# Altium PCB LPC55S69_MINI [B].PCBdoc (part 2 of 2)
Units mil, origin at the board's own origin, x right, y up, seen from the top; angles counter-clockwise.
Board outline 1610.03 x 1685.03 mil, 2 copper layers (Top Layer, Bottom Layer), stack 31.2 mil thick; 68 components, 56 nets, 271 pads, 122 vias.
Unrouted connection lines stored in the file: 1.
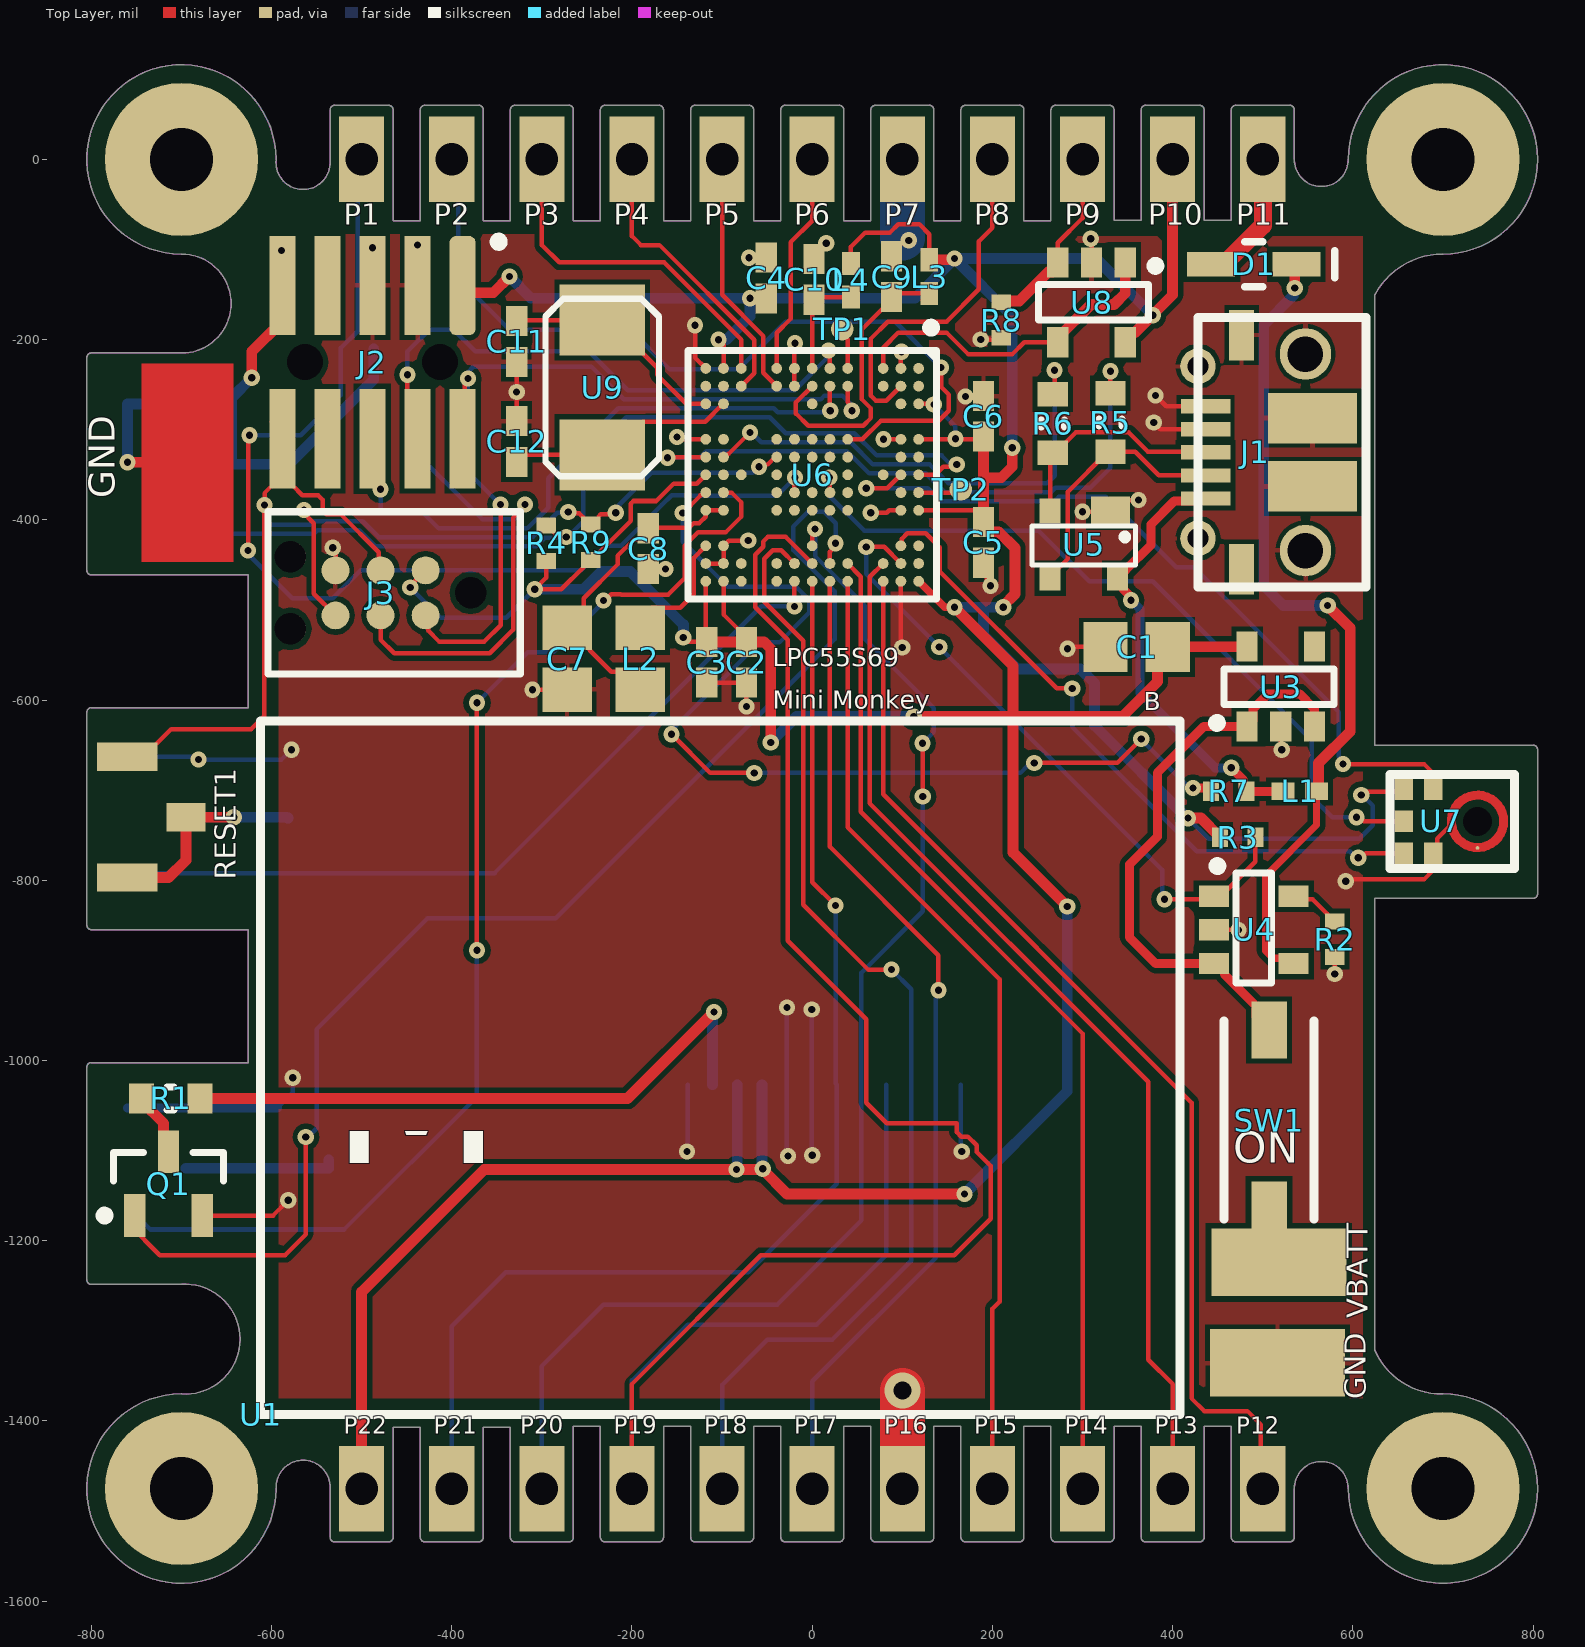
[diagram p0: Top Layer view]

## Via types
v1: diameter 18, hole 8, Top Layer to Bottom Layer, tented both sides, 121 vias
v2: diameter 40, hole 20, Top Layer to Bottom Layer, tented both sides, 1 vias

## Nets (pads, with @x,y where several pads share a name; then routed paths per layer and width w, separated by ;. In a path a pad name is that pad's centre, name@x,y a point inside that pad or via, vN(x,y) a via of type N, cw(c..) or ccw(c..) an arc to the next point about the centre after c; other vN are vias at no path point) (continued)
MIC_DATA: (continued)
  Bottom Layer w5: v1(19,-353) 19,-373.06 57.94,-412 251.06,-412 307.32,-468.26 377.74,-468.26 554.17,-644.69 554.17,-707.17 577,-730 v1(604,-730)
MIC_WS: U6.B11 U7.1 | length 761.3
  Top Layer w5: U6.B11 99.62,-427.54 99.62,-420.85 105.47,-415 126.08,-415 141.69,-430.6 141.69,-457.35 271.33,-587 v1(288.67,-587) ; v1(606,-775) 609.52,-775 614.52,-770 U7.1
  Bottom Layer w5: v1(288.67,-587) 288.67,-629.83 426.75,-767.92 596.57,-767.92 v1@606.38,-777.72
NetC7_2: C7.2 C8.2 L2.1 U6.M9 U6.N9 | length 370.8
  Top Layer w5: C7.2 -270.52,-518.07 -253.59,-501.14 -253.59,-487.06 -216,-449.47 -216,-439.99 -198.26,-422.25 -191.31,-422.25 -182,-412.94 -182,-405.49 -176.51,-400 -176.51,-409 -136.8,-409 -131.3,-403.5 -125.17,-403.5 -118.11,-396.44 U6.N9 U6.M9 ; C7.2@-269.05,-519.55 -246.94,-541.66 -246.94,-544.61 -223.13,-568.42 -211.03,-568.42 L2.1
NetC9_1: C9.1 L3.2 U6.G2 | length 337.8
  Top Layer w5: U6.G2 -18,-269.57 -18,-282 -4.5,-295.5 56.65,-295.5 65.24,-286.91 65.24,-276.38 55.24,-266.38 55.24,-188.32 88,-155.56 88,-150.64 89.94,-148.7 L3.2 130,-149.07 L3.2@122.66,-156.41
NetC10_2: C10.2 L4.2 U6.G1 | length 119.3
  Top Layer w5: U6.G1 0,-157.64 C10.2 4.94,-152.7 L4.2
NetC11_2: C11.2 U6.N3 U9.2 | length 253.7
  Top Layer w5: C11.2 -326.83,-178.2 U9.2 -224.8,-178.2 -172,-231 -172,-239.2 -139.94,-271.26 U6.N3
NetC12_2: C12.2 U6.M3 U9.1 | length 256.2
  Top Layer w5: C12.2 -320.17,-327.8 -225.13,-327.8 -188.26,-290.93 -185.33,-290.93 -118.69,-290.93 -99.02,-271.26 U6.M3
NetD1_2: D1.2 L1.2 U4.4 | length 909.6
  Top Layer w8: U4.4 528.48,-886.59 511.59,-886.59 503.19,-878.19 503.19,-795.23 559.7,-738.72 L1.2
  Top Layer w12: v1(535.58,-142.58) 535.58,-118.02 D1.2 ; 561.86,-690.47 561.86,-669.86 597,-634.72 597,-520 v1(572,-495)
  Bottom Layer w12: v1(535.58,-142.58) 534.43,-143.73 534.43,-150.57 501,-184 501,-473.17 522.83,-495 v1(572,-495)
NetL2_2: L2.2 U6.N11 | length 130.4
  Top Layer w5: L2.2@-191,-510.55 -177.89,-497.44 -146.44,-497.44 -131.63,-482.63 -131.63,-442.26 U6.N11
NetP9_1: P9.1 R8.2 U8.3 | length 209.4
  Top Layer w5: U8.3 272.6,-92.4 300,-65 P9.1
  Top Layer w12: R8.2 211.42,-157.09 229.72,-157.09 261.87,-124.95 266.79,-124.95 272.6,-119.14 U8.3
NetQ1_3: Q1.3 R1.1 | length 79.2
  Top Layer w12: R1.1@-744.48,-1044.95 -719.73,-1069.7 -719.73,-1095.81 Q1.3 Q1.3@-714.4,-1090.57
NetR1_2: R1.2 U2.2 | length 691.9
  Top Layer w12: R1.2 -205,-1042 v1(-109,-946)
  Bottom Layer w12: U2.2 -110.71,-947.71 v1(-109,-946)
NetR2_2: R2.2 U4.5 | length 58.5
  Top Layer w5: U4.5 537.92,-821.22 555.59,-821.22 571.67,-837.3 571.67,-839.27 578.03,-845.63 R2.2
NetR5_2: R5.2 U6.N6 | length 711.5
  Top Layer w5: v1(-160.57,-331.15) -159.74,-330.32 U6.N6 ; R5.2@322.31,-250.83 R5.2 v1(331,-235)
  Bottom Layer w5: v1(-160.57,-331.15) -125.09,-331.15 -117.75,-323.82 38.53,-323.82 63.22,-348.5 126.02,-348.5 147.02,-369.5 264.64,-369.5 269.64,-364.5 308.5,-364.5 331,-342 v1(331,-235)
NetR6_2: R6.2 U6.M6 | length 550
  Top Layer w5: U6.M6 -96.53,-330.32 -93.04,-326.82 -92.82,-326.82 v1(-69,-303) ; R6.2 269,-258.52 v1(269,-234)
  Bottom Layer w5: v1(-69,-303) -67.3,-303 -56.48,-313.82 42.67,-313.82 67.36,-338.5 130.17,-338.5 151.17,-359.5 260.5,-359.5 269,-351 v1(269,-234)
NetR7_1: R7.1 U6.N8 | length 1106.5
  Top Layer w5: v1(-156,-638) -113.13,-680.87 v1(-64.36,-680.87) ; v1(-143.63,-392.5) -124.01,-372.88 -123.2,-372.88 -120,-369.69 U6.N8 ; v1(246.33,-669.67) 338.7,-669.67 v1(365.19,-643.19)
  Top Layer w10: v1(422.47,-697.4) 438.51,-697.4 R7.1
  Bottom Layer w5: v1(-156,-638) -156,-634.48 -151.72,-630.2 -151.72,-628.95 -58.77,-536 -36.35,-536 -3.19,-502.83 -3.19,-489.17 -18.35,-474 -94,-474 -143.63,-424.37 v1(-143.63,-392.5) ; v1(-64.36,-680.87) 231.13,-680.87 239,-673 239.48,-673 242.81,-669.67 v1(246.33,-669.67) ; v1@371.1,-649.88 413.88,-692.65 414.2,-692.65 418.95,-697.4 v1(422.47,-697.4)
NetTP1_1: TP1.1 U6.E1 | length 46.1
  Top Layer w5: TP1.1 33.35,-193.73 39.37,-199.75 U6.E1
NetTP2_1: TP2.1 U6.A8 | length 40.4
  Top Layer w5: U6.A8 155.5,-369.69 TP2.1@157.63,-367.56
PIO0_15: P4.1 U6.L2 | length 325.7
  Top Layer w5: P4.1 -200,-85 -190,-95 -169.5,-95 -64.36,-200.13 -64.36,-237.2 U6.L2
PIO0_16: P5.1 U6.J2 | length 276.7
  Top Layer w5: P5.1 -100,-150.35 -54.36,-195.99 -54.36,-236.58 U6.J2
PIO0_23: P6.1 U6.J1 | length 248.2
  Top Layer w5: U6.J1 -39.37,-192.37 -24,-177 -24,-92 0,-68 P6.1
PIO0_24: P14.1 U6.E12 | length 1134.5
  Top Layer w5: U6.E12 54,-463.06 54,-724 300,-970 P14.1
PIO0_27: U6.N2
PIO0_29: P1.1 U6.H8 | length 1223.7
  Top Layer w5: v1(-626,-434) -626,-307.57 v1(-624.43,-306) ; U6.H8 -19.69,-358.69 -19,-358 v1(-19,-353)
  Bottom Layer w5: v1(-626,-434) -626,-438 -577,-487 -532,-487 -501,-456 -257,-456 -229.48,-428.48 -211.86,-428.48 -166.81,-383.43 -155.92,-372.54 -135.96,-372.54 -135.44,-373.06 -39.06,-373.06 v1(-19,-353) ; v1(-624.43,-306) -567.5,-306 -522.93,-261.44 -522.93,-208.93 -504.5,-190.5 -504.5,-4.5 P1.1
PIO0_30: P2.1 U6.E5 | length 932.3
  Top Layer w5: U6.E5 55.67,-310.63 76.3,-290 140.33,-290 151.5,-278.83 151.5,-260.93 143,-252.43 v1(143,-231)
  Bottom Layer w5: P2.1 -393,-7 -393,-132 -336,-189 -202,-189 -157.91,-233.09 -82.09,-233.09 -29.26,-180.26 92.26,-180.26 v1(143,-231)
PIO0_31: P3.1 U6.L1 | length 391.7
  Top Layer w5: P3.1 -300,-95 -280.78,-114.22 -164.42,-114.22 -78.74,-199.9 U6.L1
PIO1_4: P8.1 U6.B2 | length 398.3
  Top Layer w5: U6.B2 82.27,-267.73 70.73,-267.73 65.24,-262.24 65.24,-198.76 84,-180 149.04,-180 185,-144.04 185,-91 200,-76 P8.1
PIO1_5: U6.M5
PIO1_26: P15.1 U6.E13 | length 1080.1
  Top Layer w5: U6.E13 39.37,-741.37 208,-910 208,-1267.42 200,-1275.42 P15.1
RST: J2.10 J3.3 R9.1 RESET1.2 U6.J6 | length 1319.5
  Top Layer w5: RESET1.2 -742.28,-663.07 -711.36,-632.15 -622.46,-632.15 -608,-617.69 -608,-383.5 -607.76,-383.25 -607.76,-370.26 -600,-362.5 J2.10@-588,-350.5 ; J2.10@-600,-290.93 -588,-302.93 J2.10 J2.10@-588,-350.5 ; J3.3 -481.07,-453.93 -481.07,-435.93 -523.5,-393.5 -539.5,-393.5 -543,-390 -543,-377.86 -548.36,-372.5 -566,-372.5 -576,-362.5 J2.10@-588,-350.5 ; v1(-270.66,-391.17) -269.25,-392.58 -258.73,-392.58 -254.33,-396.99 -254.33,-398.96 -247.97,-405.32 R9.1 -244.03,-405.32 -237.67,-398.96 -237.67,-396.99 -234.51,-393.82 -225.08,-393.82 -223.26,-392 v1(-218,-392) ; -49.46,-338.51 -41.26,-330.32 U6.J6
  Bottom Layer w5: v1(-607.85,-383.5) -607.85,-397.95 -600.3,-405.5 -557.17,-405.5 -553.17,-401.5 -498.61,-401.5 -480.75,-419.35 -310.35,-419.35 -283.08,-392.08 -271.57,-392.08 v1(-270.66,-391.17) ; v1(-218,-392) -218,-387 -178.75,-347.75 -65.75,-347.75 v1(-59,-341)
SWD_CLK: J2.4 J3.4 U6.F1 | length 1232
  Top Layer w5: J3.4 -479,-533 -464,-548 -358,-548 -332,-522 -332,-397.55 -318.82,-384.36 v1(-318.82,-383) ; v1(-449.25,-238.85) -449.25,-285.75 -435,-300 J2.4@-438,-303 ; v1(18,-212) 19.69,-213.69 U6.F1
  Bottom Layer w5: v1(-318.82,-383) -318.82,-387.48 -330.69,-399.35 -365.98,-399.35 -449.25,-316.08 v1(-449.25,-238.85) -449.17,-238.77 -449.17,-212.87 -425.13,-188.83 -398.02,-188.83 -373.83,-213.03 -247.83,-213.03 -204.86,-256 -19.31,-256 18,-218.69 v1(18,-212)
SWD_IO: J2.2 J3.2 U6.E2 | length 945.5
  Top Layer w5: J3.2 -426.24,-508.76 -426.24,-522.83 -414.07,-535 -364.04,-535 -345.81,-516.77 v1(-345.81,-382.85) ; J2.2@-388,-303 -385.5,-300.5 -385.5,-239.5 v1(-382,-243) ; U6.E2 39.37,-269.37 v1@42,-272
  Bottom Layer w5: v1(-345.81,-382.85) -346.15,-382.85 -382,-347 v1(-382,-243) -382,-236 -376,-230 -245,-230 -209,-266 9.67,-266 13.17,-262.5 33.76,-262.5 42,-270.74 v1@42,-272
  other v1: 44,-279
SWO: J2.6 J3.6 U6.F2 | length 851.2
  Top Layer w5: v1(-564,-389) -564,-392.52 -559.13,-397.39 -559.13,-397.67 -553,-403.8 -553,-482 J3.6 ; v1@19.69,-278.32 U6.F2
  Bottom Layer w5: v1(-564,-389) -561.5,-391.5 -478.93,-391.5 ; v1(-478.93,-366.11) -478.93,-391.5 ; v1@19,-280.63 -38.23,-280.63 -42.86,-276 -215.11,-276 -293.08,-353.98 -293.08,-386.42 -316.02,-409.35 -414.65,-409.35 -432.5,-391.5 -478.93,-391.5
  other v1: 20,-279
"USB0 _VBUS": U6.E9
VBATT: pad.1 SW1.1
VBATT_SW: SW1.2 U3.1 U3.3 U4.3 | length 647.8
  Top Layer w10: SW1.2 492.31,-951.31 492.31,-939.01 457.44,-904.13 457.44,-899.21 450.63,-892.4 U4.3 381.4,-892.4 352,-863 352,-782.63 383,-751.63 383,-680.87 434.58,-629.29 U3.1 489.41,-622.48 489.41,-609.59 506,-593 541,-593 557.4,-609.4 U3.3
pads on no net: J2.7 J2.8 J2.A J3.A J3.B J3.C U3.4 U6.A1 U6.A2 U6.A6 U6.A11 U6.A12 U6.B3 U6.B6 U6.B8 U6.C2 U6.C7 U6.E6 U6.E7 U6.E8 U6.F5 U6.F6 U6.F9 U6.G3 U6.G5 U6.G6 U6.G8 U6.G9 U6.H5 U6.H6 U6.H9 U6.J5 U6.J7 U6.J8 U6.J9 U6.J12 U6.J13 U6.L7 U6.L12 U6.L13 U6.M2 U6.M7 U7.PORT_HOLE

## Polygon pours and split planes (outlines as drawn)
GND on Bottom Layer "GND_L02_P000" (solid, remove dead copper, pour order 0): -591,-84.15 -591,-1375 609.2,-1375 609.2,-84.15
GND on Top Layer "GND_L01_P002" (solid, remove dead copper, pour order 2): -592,-83 -130,-83 -130,-480 130,-480 130,-85 611,-85 611,-1375 -592,-1375

## Keep-outs
Keep-Out Layer:
  lines w0.1: -699.97,-214.79 ccw(c-700,-219.8) -700,-214.79 -800,-214.79 ccw(c-800,-219.8) -805.01,-219.8 -805.01,-456.02 ccw(c-800,-456.02) -800,-461.04 -625.96,-461.04 -625.96,-608.49 -800,-608.49 ccw(c-800,-613.5) -805.01,-613.5 -805.01,-849.72 ccw(c-800,-849.72) -800,-854.74 -625.96,-854.74 -625.96,-1002.19 -800,-1002.19 ccw(c-800,-1007.2) -805.01,-1007.2 -805.01,-1243.43 ccw(c-800,-1243.43) -800,-1248.44 -700,-1248.44 ccw(c-700,-1243.43) -699.68,-1248.43 ; -699.97,-214.79 ccw(c-699.69,-159.9) -644.8,-159.9 ccw(c-699.69,-159.9) -699.97,-105.01 ; -699.97,-214.79 -699.97,-214.79 ; -699.97,-105.01 cw(c-700,-100) -700,-105.01 cw(c-700,0) -594.99,0 cw(c-600,0) -595.01,-0.49 ; -699.97,-105.01 -699.97,-105.01 ; -699.65,-1370 ccw(c-700,-1375) -700,-1369.99 ccw(c-700,-1475) -594.99,-1475 ccw(c-600,-1475) -594.99,-1474.8 ; -699.68,-1370 ccw(c-695.79,-1309.21) -699.65,-1370 ; -699.65,-1370 ccw(c-695.79,-1309.21) -634.88,-1309.21 ccw(c-695.79,-1309.21) -699.68,-1248.43 ; -699.68,-1370 -699.65,-1370 ; -699.68,-1248.43 -699.68,-1248.43 ; -594.99,-1474.8 cw(c-565,-1473.57) -534.99,-1473.57 cw(c-565,-1473.57) -535.01,-1474.8 ; -594.99,-1474.8 -594.99,-1474.8 ; -595.01,-0.49 cw(c-565,-3.21) -595.01,-0.46 -595.01,-0.49 ; -595.01,-0.49 ccw(c-565,-3.21) -534.87,-3.21 ccw(c-565,-3.21) -534.99,-0.49 ; -535.01,-1474.8 ccw(c-530,-1475) -535.01,-1475 -535.01,-1529.09 ccw(c-530,-1529.09) -530,-1534.11 -470,-1534.11 ccw(c-470,-1529.09) -464.99,-1529.09 -464.98,-1406.71 -435.01,-1406.71 -435.01,-1529.09 ccw(c-430,-1529.09) -430,-1534.11 -370,-1534.11 ccw(c-370,-1529.09) -364.99,-1529.09 -364.98,-1406.71 -335.01,-1406.71 -335.01,-1529.09 ccw(c-330,-1529.09) -330,-1534.11 -270,-1534.11 ccw(c-270,-1529.09) -264.99,-1529.09 -264.98,-1405.84 -235.01,-1405.84 -235.01,-1529.09 ccw(c-230,-1529.09) -230,-1534.11 -170,-1534.11 ccw(c-170,-1529.09) -164.99,-1529.09 -164.98,-1405.84 -135.01,-1405.84 -135.01,-1529.09 ccw(c-130,-1529.09) -130,-1534.11 -70,-1534.11 ccw(c-70,-1529.09) -64.99,-1529.09 -64.98,-1405.84 -35.01,-1405.84 -35.01,-1529.09 ccw(c-30,-1529.09) -30,-1534.11 30,-1534.11 ccw(c30,-1529.09) 35.01,-1529.09 35.02,-1405.84 64.99,-1405.84 64.99,-1529.09 ccw(c70,-1529.09) 70,-1534.11 130,-1534.11 ccw(c130,-1529.09) 135.01,-1529.09 135.02,-1405.84 164.99,-1405.84 164.99,-1529.09 ccw(c170,-1529.09) 170,-1534.11 230,-1534.11 ccw(c230,-1529.09) 235.01,-1529.09 235.02,-1405.84 264.99,-1405.84 264.99,-1529.09 ccw(c270,-1529.09) 270,-1534.11 330,-1534.11 ccw(c330,-1529.09) 335.01,-1529.09 335.02,-1405.84 364.99,-1405.84 364.99,-1529.09 ccw(c370,-1529.09) 370,-1534.11 430,-1534.11 ccw(c430,-1529.09) 435.01,-1529.09 435.02,-1405.84 464.99,-1405.84 464.99,-1529.09 ccw(c470,-1529.09) 470,-1534.11 530,-1534.11 ccw(c530,-1529.09) 535.01,-1529.09 535.02,-1475 cw(c565,-1475) 594.99,-1475 ccw(c700,-1475) 805.01,-1475 ccw(c700,-1475) 700,-1369.99 ccw(c700,-1375) 699.88,-1369.99 ; -535.01,-1474.8 -535.01,-1474.8 ; -534.99,-0.49 cw(c-530,0) -535.01,0 -535.01,55 cw(c-530,55) -530,60.01 -470,60.01 cw(c-470,55) -464.99,55 -464.98,-68.25 -435.01,-68.25 -435.01,55 cw(c-430,55) -430,60.01 -370,60.01 cw(c-370,55) -364.99,55 -364.98,-68.25 -335.01,-68.25 -335.01,55 cw(c-330,55) -330,60.01 -270,60.01 cw(c-270,55) -264.99,55 -264.98,-68.25 -235.01,-68.25 -235.01,55 cw(c-230,55) -230,60.01 -170,60.01 cw(c-170,55) -164.99,55 -164.98,-68.25 -135.01,-68.25 -135.01,55 cw(c-130,55) -130,60.01 -70,60.01 cw(c-70,55) -64.99,55 -64.98,-68.25 -35.01,-68.25 -35.01,55 cw(c-30,55) -30,60.01 30,60.01 cw(c30,55) 35.01,55 35.02,-68.25 64.99,-68.25 64.99,55 cw(c70,55) 70,60.01 130,60.01 cw(c130,55) 135.01,55 135.02,-68.25 164.99,-68.25 164.99,55 cw(c170,55) 170,60.01 230,60.01 cw(c230,55) 235.01,55 235.02,-68.25 264.99,-68.25 264.99,55 cw(c270,55) 270,60.01 330,60.01 cw(c330,55) 335.01,55 335.02,-67.39 364.99,-67.39 364.99,55 cw(c370,55) 370,60.01 430,60.01 cw(c430,55) 435.01,55 435.02,-67.39 464.99,-67.39 464.99,55 cw(c470,55) 470,60.01 530,60.01 cw(c530,55) 535.01,55 535.02,0 ccw(c565,0) 594.99,0 cw(c700,0) 805.01,0 cw(c700,0) 700,-105.01 ; -534.99,-0.49 -534.99,-0.49 ; 699.88,-1369.99 cw(c698.53,-1289.07) 624.23,-1321.15 624.23,-820.01 800,-820.01 ccw(c800,-815) 805.01,-815 805.02,-655 ccw(c800,-655) 800,-649.99 624.23,-649.99 624.23,-150.19 cw(c700.19,-191.46) 699.98,-105.02 ; 699.88,-1369.99 ccw(c698.53,-1289.07) 699.91,-1369.99 ; 699.88,-1369.99 699.91,-1369.99 ; 699.88,-1369.99 699.88,-1369.99 ; 700.01,-105.01 ccw(c700.19,-191.46) 699.98,-105.02 ; 700,-105.01 700.01,-105.01

## Other copper
Top Layer:
  rectangle net GND: -744.48,-446.65 -642,-226.65

## Silkscreen, mask and mechanical layers (free items; w line width, h text height)
Top Overlay:
  text "GND" at -764,-376 h50 r90
  text "LPC55S69" at -44,-569 h35
  text "Mini Monkey" at -44,-616 h35
  text "B" at 368,-618 h35
  text "VBATT" at 624,-1286 h40 r90
  text "M" at -535,-1332 h1150
  text "GND" at 622,-1376 h40 r90
Bottom Overlay:
  lines w15: 644,-769 713,-769 ; 644,-698 715,-698 ; 769,-800 cw(c769,-735) 769,-670 769,-800
  text "11" at 568,-65 h40
  text "1" at -531,-66 h40
  text "1" at -150,-1134 h75
  text "22" at -546,-1437 h40
  text "12" at 585,-1437 h40
[8] Board Outline:
  lines w1: -330,-1401.69 -370,-1401.69 -370,-1529.09 -430,-1529.09 -430,-1401.69 -470,-1401.69 -470,-1529.09 -530,-1529.09 -530,-1475 ccw(c-565,-1473.57) -600,-1475 cw(c-700,-1475) -700,-1375 ccw(c-695.79,-1309.21) -700,-1243.43 -800,-1243.43 -800,-1007.2 -620.94,-1007.2 -620.94,-849.72 -800,-849.72 -800,-613.5 -620.94,-613.5 -620.94,-456.02 -800,-456.02 -800,-219.8 -700,-219.8 ccw(c-699.69,-159.9) -700,-100 cw(c-700,0) -600,0 ccw(c-565,-3.21) -530,0 -530,55 -470,55 -470,-73.27 -430,-73.27 -430,55 -370,55 -370,-73.27 -330,-73.27 -330,55 -270,55 -270,-73.27 -230,-73.27 -230,55 -170,55 -170,-73.27 -130,-73.27 ; -330,-1400.83 -330,-1529.09 -270,-1529.09 -270,-1400.83 -230,-1400.83 -230,-1529.09 -170,-1529.09 -170,-1400.83 -130,-1400.83 -130,-1529.09 -70,-1529.09 -70,-1400.83 -30,-1400.83 -30,-1614.54 30,-1614.54 30,-1400.83 70,-1400.83 70,-1529.09 130,-1529.09 130,-1404.67 ; -130,-69.43 -130,55 -70,55 -70,-73.27 -30,-73.27 -30,55 30,55 30,-73.27 70,-73.27 70,55 130,55 130,-73.27 170,-73.27 170,55 230,55 230,-73.27 270,-73.27 270,55 330,55 330,-73.27 ; 130,-1400.83 170,-1400.83 170,-1529.09 230,-1529.09 230,-1400.83 270,-1400.83 270,-1529.09 330,-1529.09 330,-1400.83 370,-1400.83 370,-1529.09 430,-1529.09 430,-1400.83 470,-1400.83 470,-1529.09 530,-1529.09 530,-1475 cw(c565,-1475) 600,-1475 ccw(c700,-1475) 700,-1375 cw(c698.53,-1289.07) 619.21,-1322.17 619.21,-815 800,-815 800,-655 619.21,-655 619.21,-148.94 cw(c700.19,-191.46) 700,-100 ccw(c700,0) 600,0 cw(c565,0) 530,0 530,55 470,55 470,-72.4 430,-72.4 430,55 370,55 370,-72.4 330,-72.4 ; 530,-1400.83 ccw(c530.08,-1400.83) 530.08,-1400.91

## Text inside footprints (layer, text, board x,y; h text height)
SW1: Top Overlay "ON" at 467,-1125.3 h59.06